# Altium PCB T-LOG v1.1.PcbDoc
Units mm, origin at the board's own origin, x right, y up, seen from the top; angles counter-clockwise.
Board outline 11.25 x 14.5 mm, 2 copper layers (TOP, BOTTOM), stack 0.136 mm thick; 19 components, 12 nets, 60 pads, 18 vias.
Unrouted connection lines stored in the file: 1.
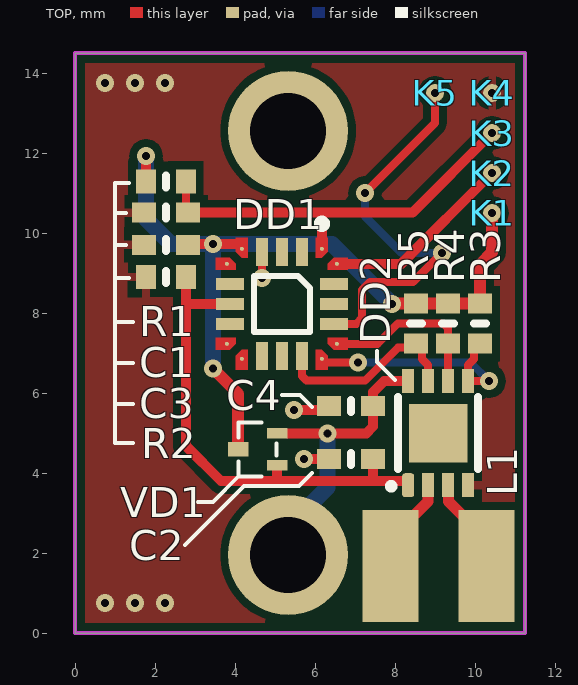
[diagram p0: TOP view]
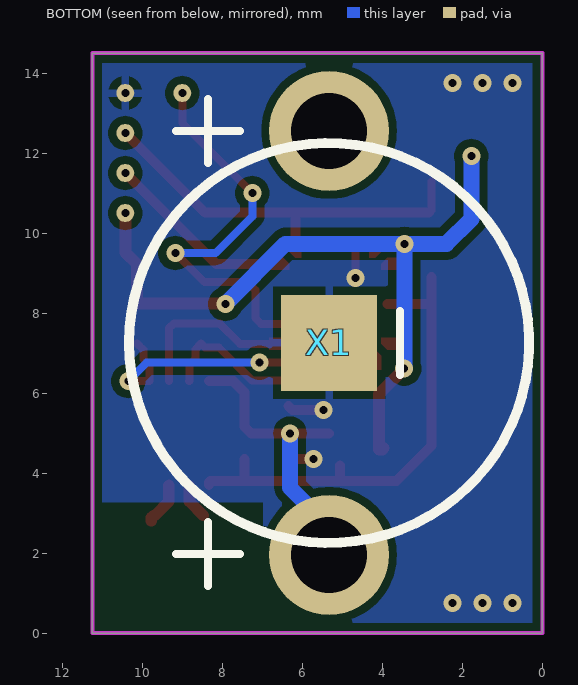
[diagram p1: BOTTOM view, seen from below]
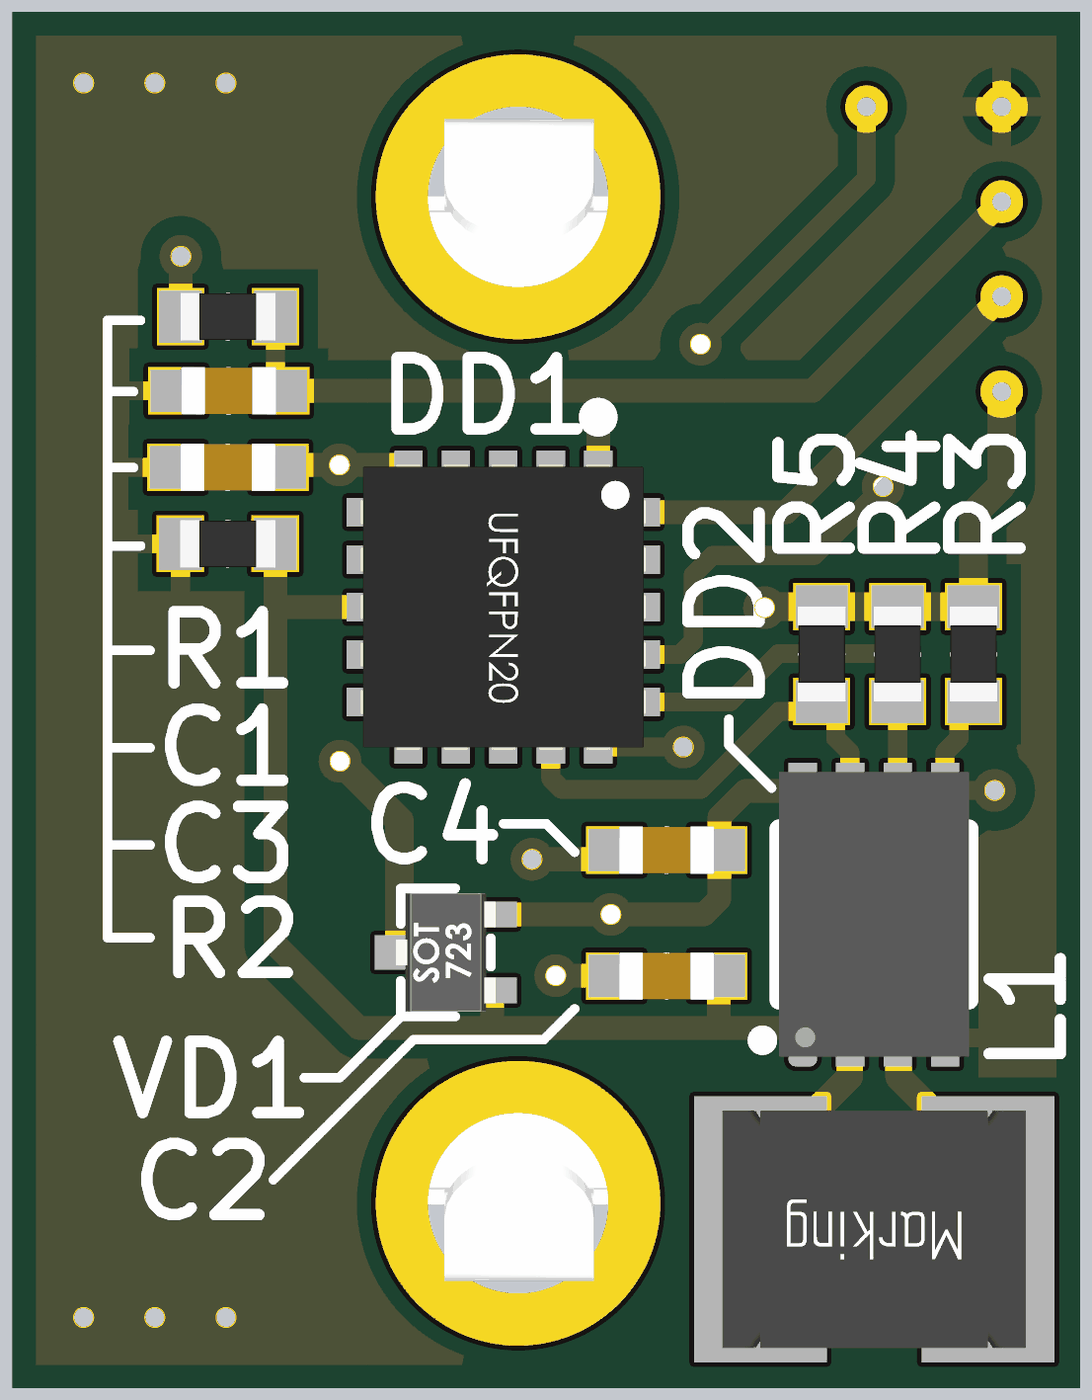
[diagram p2: 3D render of the assembled board from above, using the file's embedded part models]

## Layer stack, top to bottom
TopMask: solder mask 0.01, Solder Resist, Dk 3.5
TOP: signal copper 0.018
Dielectric 1: core 0.1, FR-4, Dk 4.2
BOTTOM: signal copper 0.018
BotMask: solder mask 0.01, Solder Resist, Dk 3.5

## Board outline
0,0 0,14.5 11.25,14.5 11.25,0

## Design rules (kind name [scope] priority, off if disabled: settings)
Clearance ClearancePOLY [InPoly] p1: gap=0.2 ignorepadtopadclearanceinfootprint=FALSE
Clearance ClearanceINNER [OnLayer('INNER1') OR OnLayer('INNER2')] p2: gap=0.15 ignorepadtopadclearanceinfootprint=FALSE
Clearance ClearanceTOPandBOTTOM [OnLayer('TOP') OR OnLayer('BOTTOM')] p3: gap=0.12 ignorepadtopadclearanceinfootprint=FALSE
Clearance POLY-BOARD [InPoly vs OnLayer('Keep-Out Layer')] p4: gap=0.5 ignorepadtopadclearanceinfootprint=FALSE
ComponentClearance [All] p1: gap=0 collisioncheckmode=3 verticalgap=0 showdistances=FALSE
DiffPairsRouting [All] p1: maxlimit=0.25 minlimit=0.1 mostfreqgap=0.125 toplayer_minwidth=0.125 toplayer_maxwidth=0.2 toplayer_prefwidth=0.125 bottomlayer_minwidth=0.125 bottomlayer_maxwidth=0.2 bottomlayer_prefwidth=0.125 maxuncoupledlength=5
HoleSize [All] p1: absolutevalues=TRUE maxlimit=5 minlimit=0.2 maxpercent=80.000 minpercent=20.000
HoleToHoleClearance [All] p1: gap=0.1 allowstackedmicrovias=TRUE
MinimumSolderMaskSliver [All] p1: minsoldermaskwidth=0.1
PlaneClearance [All] p1: clearance=0.5
PlaneConnect [All] p1: planeconnectstyle=Relief reliefexpansion=0.5 reliefentries=4 reliefconductorwidth=0.25 reliefairgap=0.25
PolygonConnect PolygonConnect_PAD_ANT [IsPad AND (InComponent('ANT1') OR InComponent('C14'))] p1: connectstyle=Relief reliefconductorwidth=0.2 reliefentries=4 polygonreliefangle="90 Angle" airgapwidth=0.125
PolygonConnect PolygonConnect_PAD [IsPad] p2: connectstyle=Relief reliefconductorwidth=0.2 reliefentries=4 polygonreliefangle="90 Angle" airgapwidth=0.2
PolygonConnect PolygonConnect_VIA [IsVia] p3: connectstyle=Direct reliefconductorwidth=0.254 reliefentries=4 polygonreliefangle="90 Angle" airgapwidth=0.254
RoutingCorners [All] p1: cornerstyle=45-Degree minsetback=1.25 maxsetback=1.25
RoutingVias [All] p1: holewidth=0.2 width=0.45 viastyle="Through Hole" minholewidth=0.2 minwidth=0.45 maxholewidth=0.2 maxwidth=0.5
SilkToSilkClearance [All] p1: silktosilkclearance=0
SilkToSolderMaskClearance [IsPad] p1: minsilkscreentomaskgap=0 clearancetoexposedcopper=TRUE
SolderMaskExpansion [All] p1: expansion=0.05 istentingtop=FALSE
Width WidthTOPandBOTTOM [OnLayer('TOP') OR OnLayer('BOTTOM')] p1: maxlimit=3 minlimit=0.125 preferedwidth=0.15
Width WidthINNER [OnLayer('INNER1') OR OnLayer('INNER2')] p2: maxlimit=3 minlimit=0.2 preferedwidth=0.3
20 further rules are at their usual default settings.

## Components (designator, comment, footprint, x,y, rotation, side; value= is the part's Value field where it differs from the comment)
C1 "10 нФ" C0402 2.279,10.509 r0 top locked
C2 "10 нФ" C0402 6.894,4.346 r0 top
C3 "10 нФ" C0402 2.271,9.703 r180 top locked
C4 "10 нФ" C0402 6.894,5.672 r0 top
DD1 "STM8L101F3U6TR" UFQPN20_3x3_0.5 6.173,9.606 r270 top locked
DD2 "M24LR64E-RMC6T" UDFN-8_2X3 9.078,4.994 r90 top locked
K1 "ISP" THRU_HOLE_02x045 10.425,10.5 r270 top
K2 "ISP" THRU_HOLE_02x045 10.425,11.5 r270 top
K3 "ISP" THRU_HOLE_02x045 10.425,12.5 r270 top
K4 "ISP" THRU_HOLE_02x045 10.425,13.5 r270 top
K5 "TEST POINT" THRU_HOLE_02x045 9,13.5 r270 top
L1 "4,7 мкГн" WE-LQ_1210 9.081,1.678 r180 top locked
R1 "100К" R0402 2.271,11.289 r180 top locked
R2 "100К" R0402 2.269,8.897 r0 top locked
R3 "4К7" R0402 10.128,7.736 r90 top locked
R4 "4К7" R0402 9.328,7.736 r90 top locked
R5 "4К7" R0402 8.528,7.736 r90 top locked
VD1 "1SS385FV" SOT-723 5.054,4.194 r90 top locked
X1 "KEYSTONE 3031" KEYSTONE_3031 5.329,7.252 r270 bottom locked

## Footprints (in the part's own frame and the unit in brackets; to place one, negate y for a bottom-side part, rotate by r counter-clockwise, add the part's x,y. Pads: shape width x height; smd on the part's side, far side on the other; paste and mask are expansions set on the pad)
C0402 [mm]
  rect 0.6x0.5 smd paste-0.025 mask+0.05: 1(-0.55,0) 2(0.55,0)
  silkscreen extent 0,-0.15 0,0.15, body extent -0.5,-0.25 0.5,0.25, height 0.63
KEYSTONE_3031 [mm]
  round 3 hole 1.9: 1(-5.3,0) 2(5.3,0)
  rect 2.4x2.4 smd paste-0.01 mask+0.075: 3(0,0)
  silkscreen extent -6.1,-5 6.07,5, body extent -6.12,-4.59 6.12,4, height 3.05
R0402 [mm]
  rect 0.5x0.6 smd paste-0.025 mask+0.05: 1(-0.5,0) 2(0.5,0)
  silkscreen extent 0,-0.15 0,0.15, body extent -0.5,-0.25 0.5,0.25, height 0.3
SOT-723 [mm]
  rect 0.27x0.52 smd paste+0 mask+0.05: 1(0,0) 2(0.8,0)
  rect 0.36x0.52 smd paste+0 mask+0.05: 3(0.4,0.975)
  silkscreen extent -0.28,0.01 1.08,0.96, body extent -0.22,-0.04 1.03,1.01, height 0.5
THRU_HOLE_02x045 [mm] "used for PIC16 ISP in T-LOG project"
  round 0.45 hole 0.2 paste+0 mask+0.05: 1(0,0)
UDFN-8_2X3 [mm]
  rrect50% 0.6x0.3 smd paste+0 mask+0.05: 1(-1.3,0.75)
  rect 0.6x0.3 smd paste+0 mask+0.05: 2(-1.3,0.25) 3(-1.3,-0.25) 4(-1.3,-0.75) 5(1.3,-0.75) 6(1.3,-0.25) 7(1.3,0.25) 8(1.3,0.75)
  rect 1.46x1.46 smd paste-0.04 mask+0.05: 9(0,0)
  silkscreen extent -1.38,-1 0.9,1.23, body extent -1.5,-1 1.5,1, height 0.53
UFQPN20_3x3_0.5 [mm] "UFQPN20 - 20-lead, 3 x 3 mm, 0.5 mm pitch"
  round 0.1 smd paste+0 mask+0: 1(0,0) 5(0,-2) 6(0.375,-2.375) 10(2.375,-2.375) 11(2.75,-2) 15(2.75,0) 16(2.375,0.375) 20(0.375,0.375)
  rect 0.7x0.3 smd paste+0 mask+0.05: 2(0.075,-0.5) 3(0.075,-1) 4(0.075,-1.5) 12(2.675,-1.5) 13(2.675,-1) 14(2.675,-0.5)
  rect 0.3x0.7 smd paste+0 mask+0.05: 7(0.875,-2.3) 8(1.375,-2.3) 9(1.875,-2.3) 17(1.875,0.3) 18(1.375,0.3) 19(0.875,0.3)
  TOP region: 0.225,-2.65 0.225,-2.3 0.375,-2.15 0.525,-2.15 0.525,-2.65
  TOP region: 2.525,-2.65 2.525,-2.3 2.375,-2.15 2.225,-2.15 2.225,-2.65
  TOP region: 2.525,0.65 2.525,0.3 2.375,0.15 2.225,0.15 2.225,0.65
  TOP region: -0.275,-2.15 0.075,-2.15 0.225,-2 0.225,-1.85 -0.275,-1.85
  TOP region: 3.025,-2.15 2.675,-2.15 2.525,-2 2.525,-1.85 3.025,-1.85
  TOP region: 3.025,0.15 2.675,0.15 2.525,0 2.525,-0.15 3.025,-0.15
  TOP region: 0.225,0.65 0.225,0.3 0.375,0.15 0.525,0.15 0.525,0.65
  TOP region: -0.275,0.15 0.075,0.15 0.225,0 0.225,-0.15 -0.275,-0.15
  silkscreen extent -0.7,-1.7 2.07,0.08, body extent -0.12,-2.5 2.88,0.5, height 0.55
WE-LQ_1210 [mm] "SMT Inductor, body 3.2x2.5mm"
  rect 1.4x2.8 smd paste+0 mask+0.05: 1(-1.2,0) 2(1.2,0)
  body extent -1.6,-1.25 1.6,1.25, height 1.99

## Part data
C1 C2 C3 C4: library part C0402, "Чип-конденсатор 0,01 мкФ 50 В 0402", TYPE="Чип-конденсатор 0402"
DD1: "Микроконтроллер  STM8L101F3U6TR UFQFPN-20"
DD2: "Память EEPROM I2C/NFC 64Кбит M24LR64E-RMC6T UFDFN8 ST"
K1 K2 K3 K4: library part THRU_HOLE_02x045, "used for STM8L ISP in T-LOG project"
K5: library part THRU_HOLE_02x045
L1: library part WE-LQ_744032004, "Чип-индуктивность WE-LQ 744032004 4,7 мкГн 0,49 А Wurth Elektronik", TYPE=LQM2HPN2R2MJ0
R1 R2: library part R0402, "Чип-резистор 100 кОм 5% 0402", TYPE="Чип-резистор 0402"
R3 R4 R5: library part R0402, "Чип-резистор 4,7 кОм 5% 0402", TYPE="Чип-резистор 0402"
VD1: "Диодная сборка с общим катодом 1SS385FV SOT-723 Toshiba"
X1: library part KEYSTONE_3031, "Держатель элемента CR1025 KEYSTONE 3031"

## Via types
v1: diameter 0.45, hole 0.2, TOP to BOTTOM, tented both sides, 18 vias

## Nets (pads, with @x,y where several pads share a name; then routed paths per layer and width w, separated by ;. In a path a pad name is that pad's centre, name@x,y a point inside that pad or via, vN(x,y) a via of type N, cw(c..) or ccw(c..) an arc to the next point about the centre after c; other vN are vias at no path point)
ANT0: DD2.2 L1.2 | length 0.9
  TOP w0.28: L1.2@8.475,2.938 8.823,3.286 DD2.2@8.823,3.684
ANT1: DD2.3 L1.1 | length 1.1
  TOP w0.28: DD2.3 9.338,3.684 9.338,3.286 9.686,2.938 9.721,2.938 9.775,2.884 L1.1@9.775,2.8
GND: C1.1 C2.1 C3.2 C4.1 DD1.4 DD2.4 K4.1 R2.1 X1.3 | length 2.2
  TOP w0.2: DD1.4 4.674,9.53 4.674,8.876 v1(4.675,8.875)
  TOP w0.25: v1(5.475,5.575) 6.248,5.575 C4.1 ; v1(5.725,4.35) 5.727,4.348 6.342,4.348 C2.1
  other v1: 0.75,0.75 1.5,0.75 2.25,0.75 0.75,13.75 1.5,13.75 2.25,13.75
I2C_SCL: DD1.16 DD2.6 R4.1 | length 4.4
  TOP w0.2: DD1.16 7.559,7.231 8.068,7.74 9.21,7.74 9.328,7.622 R4.1 DD2.6
I2C_SDA: DD1.15 DD2.5 R3.1 | length 6
  TOP w0.2: DD1.15 6.279,6.75 6.286,6.757 v1(7.07,6.757) ; R3.1 9.975,7.083 9.975,6.85 9.825,6.7 9.825,6.298 DD2.5 9.834,6.3 v1(10.35,6.3)
  BOTTOM w0.2: v1(7.07,6.757) 9.893,6.757 v1(10.35,6.3)
PWR_HARVEST: C2.2 DD1.8 DD2.1 R2.2 VD1.1 | length 12.3
  TOP w0.25: R2.2 2.769,8.225 ; DD1.8 2.775,8.231 2.769,8.225 ; VD1.1 5.054,3.829 5.025,3.8 ; C2.2 7.444,3.806 7.45,3.8 ; DD2.1 8.328,3.775 8.303,3.8 7.45,3.8 ; 2.769,8.225 2.769,4.681 3.65,3.8 4.7,3.8 5.025,3.8 ; 5.025,3.8 7.45,3.8
PWR_MCU: C3.1 DD1.5 K1.1 R1.2 R3.2 R4.2 R5.2 VD1.3 | length 20.6
  TOP w0.25: R1.2 1.773,11.291 1.773,11.923 v1(1.775,11.925) ; C3.1@2.846,9.728 v1(3.446,9.728) 4.045,9.728
  TOP w0.3: v1(3.452,6.608) 4.079,5.981 VD1.3 3.999,4.594 VD1.3@3.969,4.624 ; v1@7.925,8.236 R5.2 R3.2 10.128,9.217 10.425,9.514 K1.1
  BOTTOM w0.3: v1@3.423,6.598 3.433,6.608 3.448,6.608 v1(3.452,6.608) ; v1@3.423,9.705 v1(3.446,9.728)
  BOTTOM w0.4: v1(1.775,11.925) 1.775,10.35 2.397,9.728 v1(3.446,9.728) 6.422,9.728 v1(7.925,8.225) ; v1@3.448,6.598 3.448,6.608 v1@3.448,9.705
RESET#: C1.2 DD1.1 K3.1 R1.1 | length 10.2
  TOP w0.2: R1.1 2.771,10.568 C1.2
  TOP w0.25: C1.2 6.175,10.509 ; DD1.1 6.173,10.506 6.175,10.509 ; K3.1 8.434,10.509 6.175,10.509 ; K3.1@10.462,12.462 K3.1@10.5,12.5
RF_INT: DD1.14 DD2.7 R5.1 | length 4.9
  TOP w0.2: DD1.14 5.673,6.427 5.788,6.312 7.254,6.312 8.076,7.134 8.426,7.134 R5.1 8.675,7.088 8.675,6.85 8.825,6.7 8.825,6.298 DD2.7
SWIM: DD1.20 K2.1 | length 4.9
  TOP w0.25: DD1.20 8.156,9.231 K2.1 ; K2.1@10.462,11.462 K2.1@10.5,11.5
TEST: DD1.17 K5.1 | length 10
  TOP w0.2: DD1.17 7.031,7.731 7.175,7.875 7.175,8.575 7.375,8.775 8.45,8.775 v1(9.175,9.5) ; v1(7.25,11) 9,12.75 K5.1
  BOTTOM w0.2: v1(7.25,11) 7.25,10.415 8.165,9.5 v1(9.175,9.5)
VCC_BAT: C4.2 DD2.8 VD1.2 X1.1 X1.2 | length 7.5
  TOP w0.25: 5.329,4.994 v1(6.306,4.994) 7.284,4.994 7.45,5.161 7.45,6.021 7.724,6.294 DD2.8
  BOTTOM w0.4: X1.2 5.329,2.656 6.306,3.633 v1(6.306,4.994)
pads on no net: DD1.2 DD1.3 DD1.6 DD1.7 DD1.9 DD1.10 DD1.11 DD1.12 DD1.13 DD1.18 DD1.19 DD2.9

## Polygon pours and split planes (outlines as drawn)
GND on BOTTOM "GND_L02_P002" (solid, remove dead copper, pour order 2): 0,14.5 11.25,14.5 11.25,0 0,0
GND on BOTTOM "GND_L02_P001" (solid, remove dead copper, pour order 1): 0,14.5
GND on TOP "GND_L01_P000" (solid, remove dead copper, pour order 0): 0,14.5 0,0 11.25,0 11.25,14.5

## Keep-outs
Keep-Out Layer:
  the board outline again, w0.1

## Other copper
TOP:
  pour cut-out: 4.423,8.981 5.923,8.981 5.923,7.481 4.423,7.481
  pour cut-out: 6.975,3.275 11.25,3.275 11.25,0 6.975,0
BOTTOM:
  pour cut-out: 6.975,3.275 11.25,3.275 11.25,0 6.975,0

## Silkscreen, mask and mechanical layers (free items; w line width, h text height)
TopSilk:
  lines w0.1: 1,5.725 1.45,5.725 ; 1,6.75 1.45,6.75 ; 1,7.775 1.45,7.775 ; 1,8.875 1.35,8.875 ; 1,9.7 1.275,9.7 ; 1,10.5 1.275,10.5 ; 1.35,11.25 1,11.25 1,4.75 1.45,4.75 ; 2.75,2.2 4.225,3.675 5.6,3.675 5.925,4 ; 3.075,3.275 3.447,3.275 4.091,3.919 ; 5.175,5.95 5.625,5.95 5.925,5.65 ; 7.55,7.05 7.55,6.775 8,6.325